# Altium PCB FLIP_FLOP.PcbDoc
Units mil, origin at the board's own origin, x right, y up, seen from the top; angles counter-clockwise.
Board outline 1790 x 1220 mil, 2 copper layers (Top Layer, Bottom Layer); 13 components, 10 nets, 31 pads, 0 vias.
Unrouted connection lines stored in the file: 1.
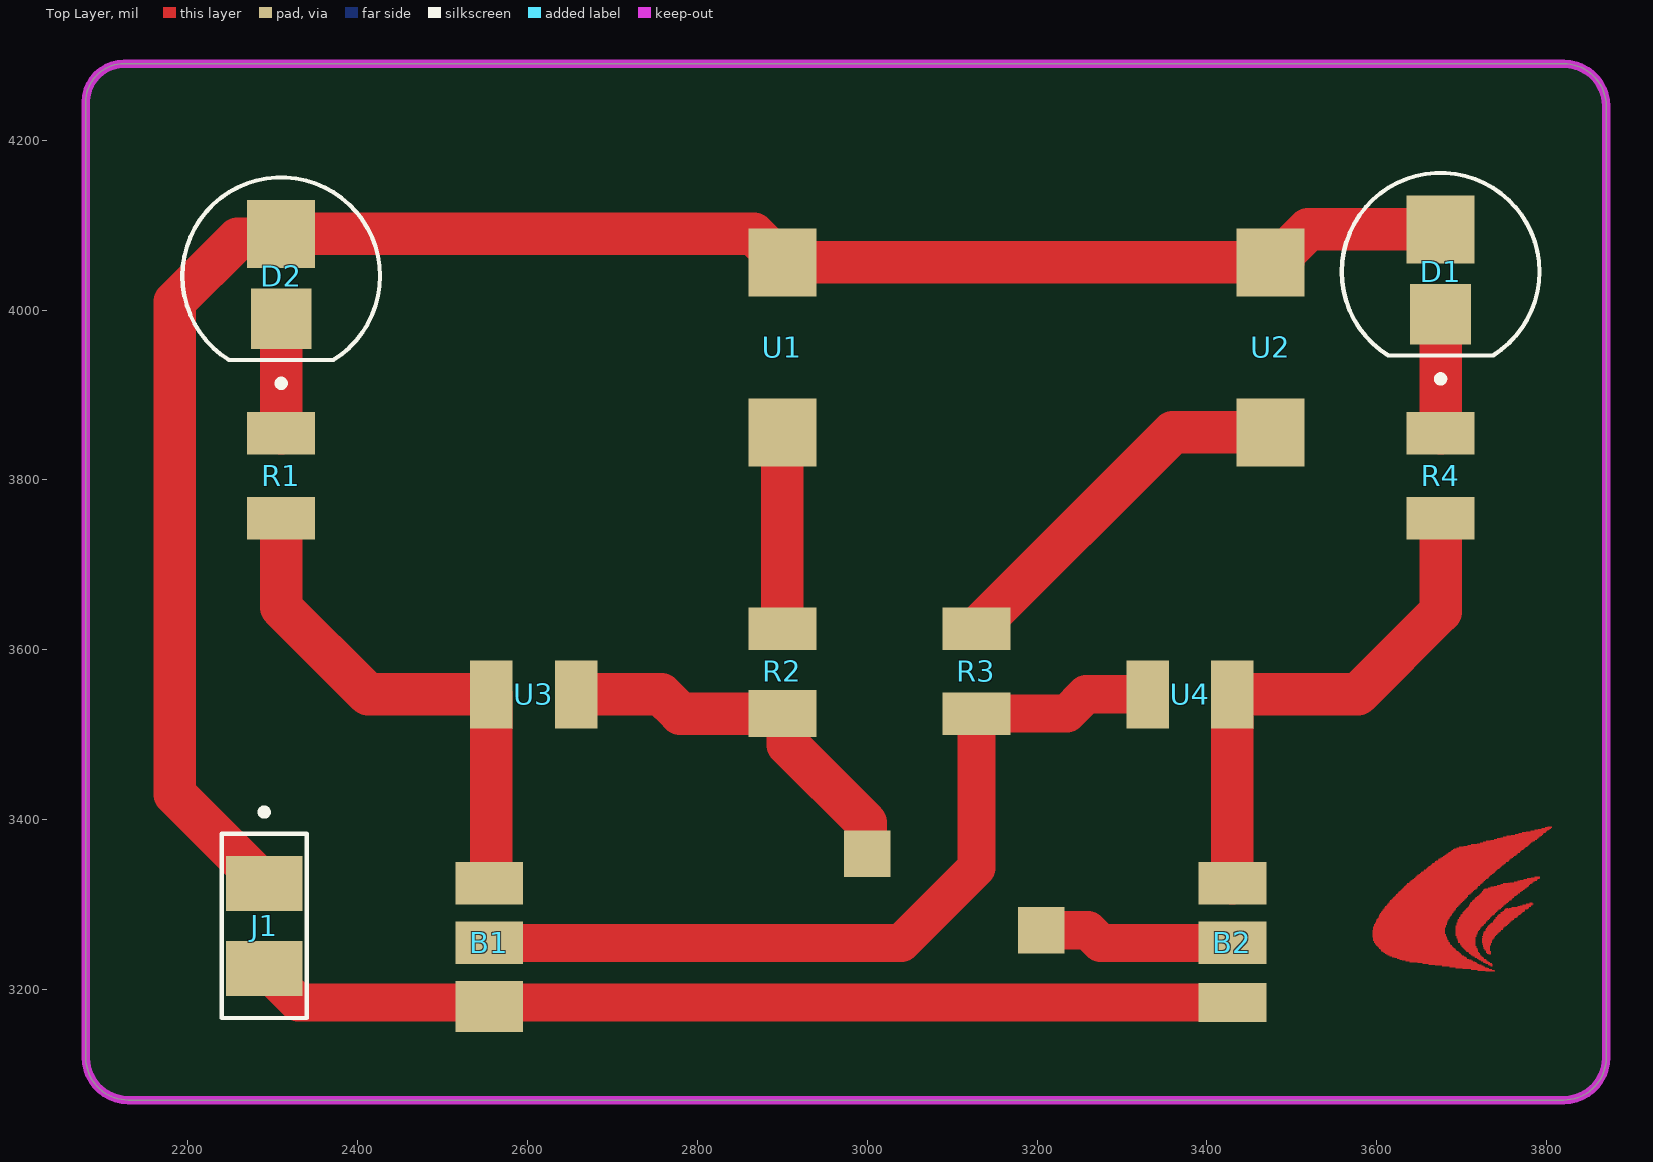
[diagram p0: Top Layer view]
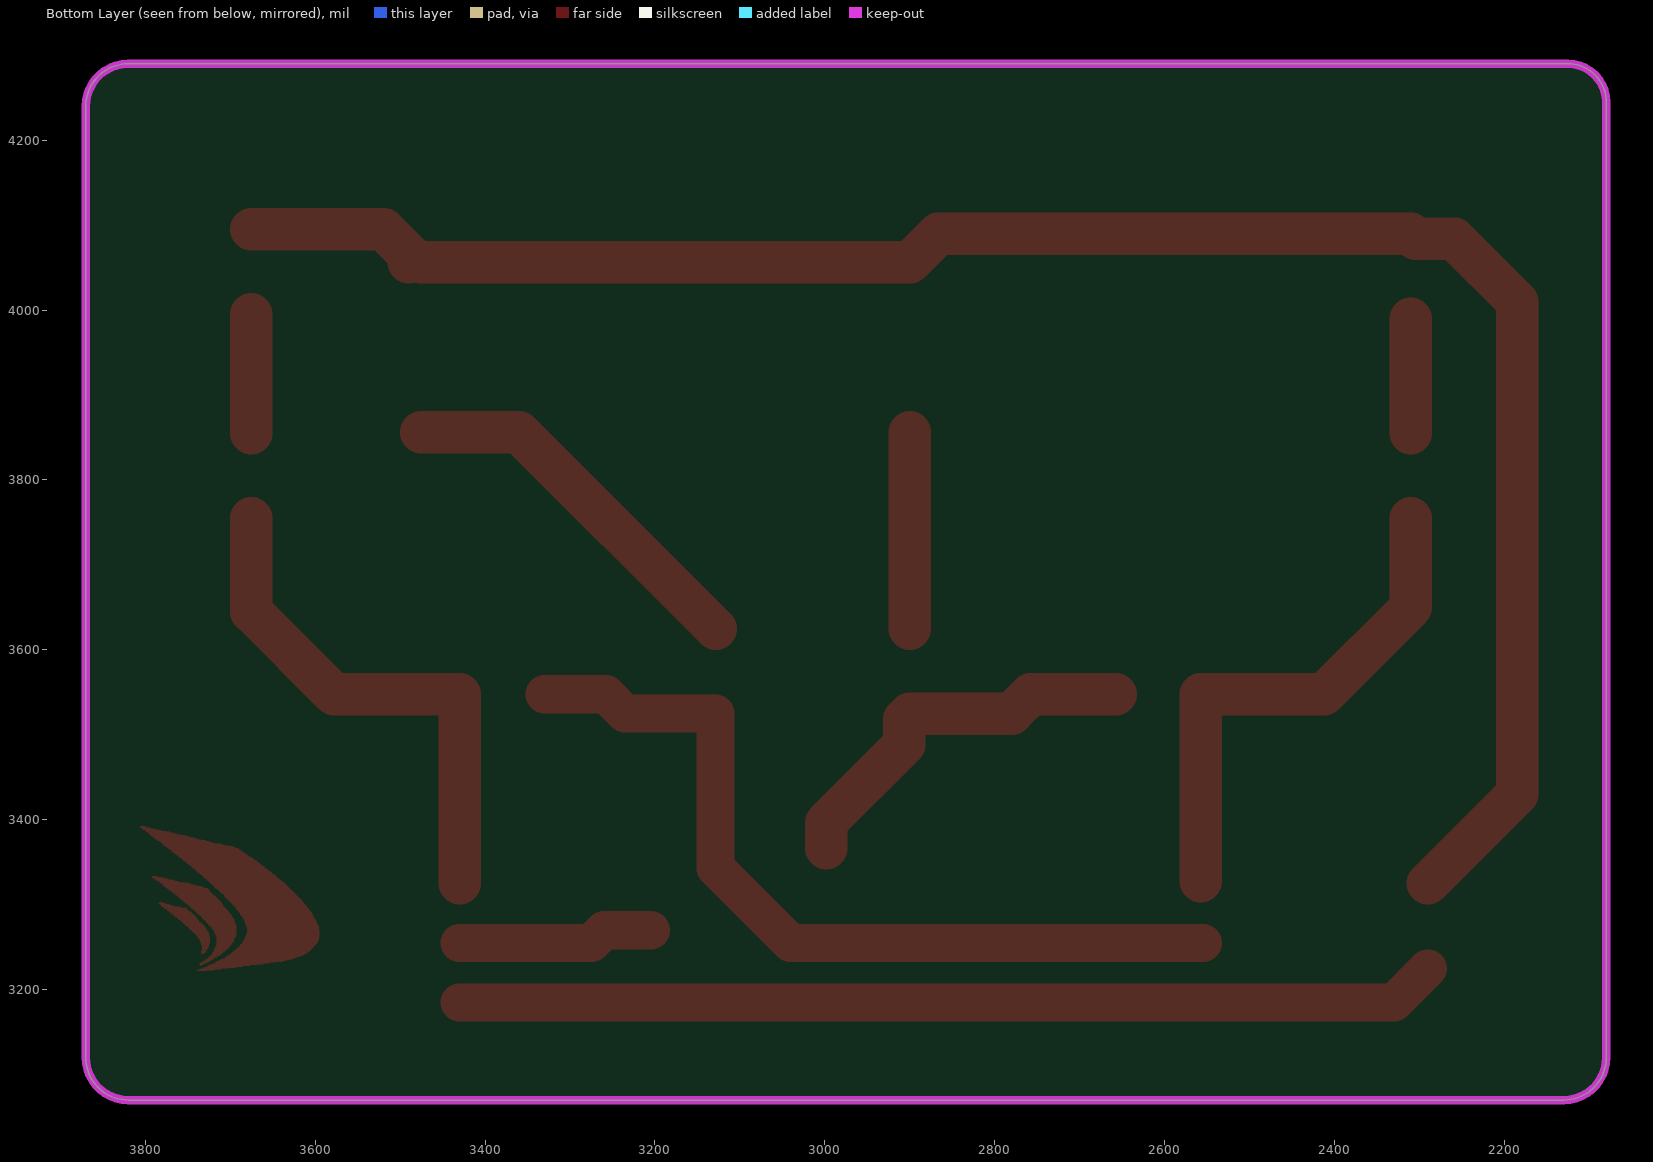
[diagram p1: Bottom Layer view, seen from below]
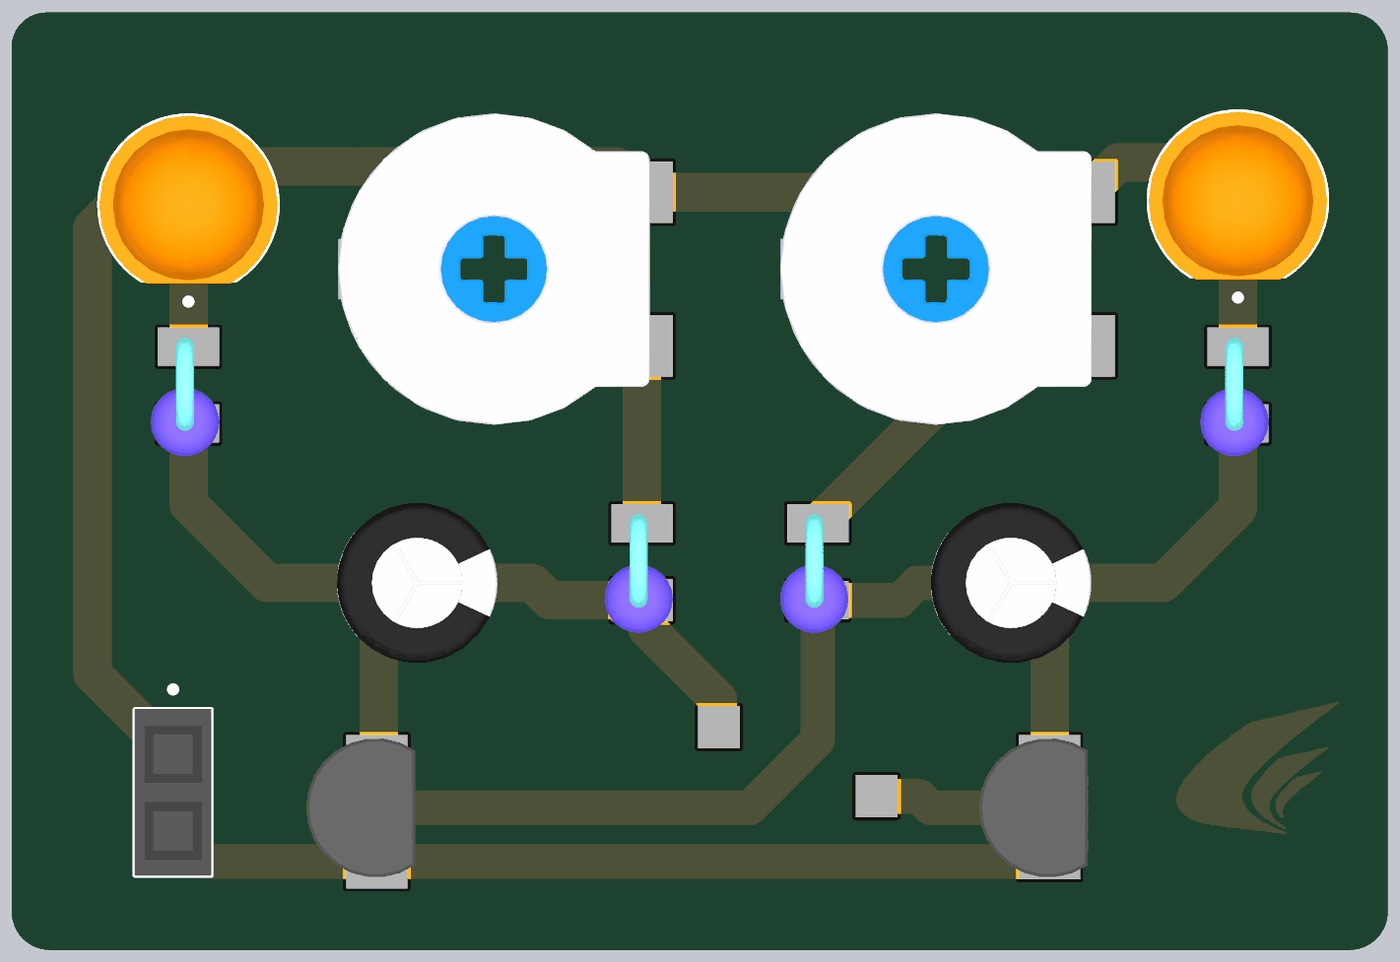
[diagram p2: 3D render of the assembled board from above, using the file's embedded part models]

## Layer stack, top to bottom
Top Solder: solder mask 0.4, Solder Resist, Dk 3.5
Top Layer: signal copper 1.4
Dielectric 1: dielectric 12.6, FR-4, Dk 4.8
Bottom Layer: signal copper 1.4
Bottom Solder: solder mask 0.4, Solder Resist, Dk 3.5

## Board outline
2080,3120 2080,4245 cw(c2125,4245) 2125,4290 3820,4290 cw(c3820,4240) 3870,4240 3870,3120 cw(c3820,3120) 3820,3070 2130,3070 cw(c2130,3120)

## Design rules (kind name [scope] priority, off if disabled: settings)
Clearance [All] p1: gap=10 ignorepadtopadclearanceinfootprint=FALSE
PolygonConnect [All] p1: connectstyle=Relief reliefconductorwidth=10 reliefentries=4 polygonreliefangle="90 Angle" airgapwidth=10
RoutingVias [All] p1: holewidth=28 width=50 viastyle="Through Hole" minholewidth=28 minwidth=50 maxholewidth=28 maxwidth=50
SolderMaskExpansion [All] p1: expansion=4 istentingtop=FALSE
Width [All] p1: maxlimit=10 minlimit=10 preferedwidth=10
30 further rules are at their usual default settings.

## Components (designator, comment, footprint, x,y, rotation, side; value= is the part's Value field where it differs from the comment)
B1 "NEW_BC547" NEW_BC547#1 2555,3325 r270 top
B2 "NEW_BC547" NEW_BC547#2 3430,3325 r270 top
D1 "L08R5000Q1" LEDRD254W57D500H1070 3675,4045 r90 top
D2 "L08R5000Q1" LEDRD254W57D500H1070 2310,4039.77 r90 top
J1 "68685-302LF" AMPHENOL_68685-302LF 2290,3275 r90 top
R1 "VERTICAL RESISTOR" VERTICAL_RESISTOR#1 2310,3755 r90 top
R2 "VERTICAL RESISTOR" VERTICAL_RESISTOR#2 2900,3525 r90 top
R3 "VERTICAL RESISTOR" VERTICAL_RESISTOR#1 3128.58,3525 r90 top
R4 "VERTICAL RESISTOR" VERTICAL_RESISTOR#1 3675,3755 r90 top
U1 "220K TRIMPOT" 220K_TRIMPOT 2900,3856.1 r90 top
U2 "220K TRIMPOT" 220K_TRIMPOT 3475,3856.1 r90 top
U3 "10uF CAPACITOR" 10uF_CAPACITOR 2557.55,3547.67 r0 top
U4 "10uF CAPACITOR" 10uF_CAPACITOR 3330,3547.67 r0 top

## Footprints (in the part's own frame and the unit in brackets; to place one, negate y for a bottom-side part, rotate by r counter-clockwise, add the part's x,y. Pads: shape width x height; smd on the part's side, far side on the other; paste and mask are expansions set on the pad)
10uF_CAPACITOR [mil] "U?"
  rect 50x80 smd: 0(0,0) 1(100,0)
  body extent -54,-104 154,104, height 472
220K_TRIMPOT [mil]
  rect 80x80 smd: 0(0,0) 1(200,0)
  body extent -103,-10 303,396, height 231
AMPHENOL_68685-302LF [mil]
  rect 65x90 smd: 01(50,0) 02(-50,0)
  silkscreen extent -108,-50 138,50, body extent -108,-50 108,50, height 276
LEDRD254W57D500H1070 [mil]
  rect 80x80 smd: A(50,0)
  rect 71.46x71.46 smd: C(-50,0)
  silkscreen extent -130,-116 116,116, body extent -102,-116 116,116, height 358
NEW_BC547#1 [mil]
  rect 50x80 smd: 0(0,0) 1(70,0) 2(140,0)
  body extent -21,-92 161,50, height 200
NEW_BC547#2 [mil]
  rect 50x80 smd: 0(0,0) 1(70,0)
  rect 46x80 smd: 2(140,0)
  body extent -21,-92 161,50, height 200
VERTICAL_RESISTOR#1 [mil]
  rect 50x80 smd: 0(0,0) 1(100,0)
  body extent -42,-40 112,49, height 366
VERTICAL_RESISTOR#2 [mil]
  rect 55x80 smd: 0(0,0)
  rect 50x80 smd: 1(100,0)
  body extent -42,-40 112,49, height 366

## Part data
B1 B2: "BC547"
D1 D2: "LED, 5MM, ORANGE; LED / Lamp Size: 5mm / T-1 3/4; LED Colour: Orange; Typ Luminous Intensity: 4.3mcd; Viewing Angle: ...", Package=None, Availability="In Stock", Check_prices=https://www.snapeda.com/parts/L08R5000Q1/LED+Technology/view-part/?ref=eda, MF="LED Technology", MP=L08R5000Q1, Price=None, SnapEDA_Link=https://www.snapeda.com/parts/L08R5000Q1/LED+Technology/view-part/?ref=snap
J1: "DuboxÂ®, Board to Board connector, PCB Mounted Receptacle, Vertical, Through Hole, Top Entry, Single Row, 2 positions, 2.54mm (0.100in) Pitch.", Package=None, Check_prices=https://www.snapeda.com/parts/68685-302LF/Amphenol+FCI/view-part/?ref=eda, Digi-Key_Part_Number=609-68685-302LF-ND, MF="Amphenol ICC (FCI)", MP=68685-302LF, Purchase-URL=https://pricing.snapeda.com/search/part/68685-302LF/?ref=eda, SnapEDA_Link=https://www.snapeda.com/parts/68685-302LF/Amphenol+FCI/view-part/?ref=snap
U1 U2: "vertical trimpot"

## Free pads (board coordinates)
  rect 55x55 smd: 3(3000,3360) 4(3205,3270)
  rect 80x50 smd: 5(2555,3175)

## Nets (pads, with @x,y where several pads share a name; then routed paths per layer and width w, separated by ;. In a path a pad name is that pad's centre, name@x,y a point inside that pad or via, vN(x,y) a via of type N, cw(c..) or ccw(c..) an arc to the next point about the centre after c; other vN are vias at no path point)
NetB1_0: B1.0 R1.0 U3.0 | length 615.1
  Top Layer w50: R1.0 2310,3650 2412.33,3547.67 U3.0 B1.0@2557.55,3327.55
NetB1_1: B1.1 R3.0 U4.0 | length 1002.5
  Top Layer w45: B1.1 3040,3255 3128.58,3343.58 R3.0 3235,3525 3257.67,3547.67 U4.0
NetB1_2: B1.2 B2.2 J1.02 pad.5 | length 1156.6
  Top Layer w45: J1.02 2330,3185 B1.2 B2.2
NetB2_0: B2.0 R4.0 U4.1 | length 618
  Top Layer w50: B2.0 U4.1 3577.67,3547.67 3675,3645 R4.0
NetB2_1: B2.1 pad.3 pad.4 R2.0 U3.1 | length 689
  Top Layer w10: R2.0 R2.0@2906.64,3518.36 ; pad.3@2998.36,3366.64 pad.3
  Top Layer w45: pad.4 3260,3270 3275,3255 B2.1
  Top Layer w50: U3.1 2757.33,3547.67 2780,3525 R2.0 ; R2.0@2906.64,3518.36 2906.64,3488.36 2998.36,3396.64 pad.3@2998.36,3366.64
NetD1_A: D1.A D2.A J1.01 U1.1 U2.1 | length 2272.2
  Top Layer w50: J1.01 2185,3430 2185,4010 2259.03,4084.03 2304.26,4084.03 D2.A 2866.33,4089.77 U1.1 U2.1 ; U2.1@3490,4056.1 3490,4065.71 3519.29,4095 D1.A
NetD1_C: D1.C R4.1 | length 140
  Top Layer w50: R4.1 D1.C
NetD2_C: D2.C R1.1 | length 134.8
  Top Layer w50: R1.1 D2.C
NetR2_1: R2.1 U1.0 | length 231.1
  Top Layer w50: R2.1 U1.0
NetR3_1: R3.1 U2.0 | length 442.1
  Top Layer w50: R3.1 3359.68,3856.1 U2.0
copper on no net: | length 16870
  Top Layer w1: 3595,3262 3682,3262 ; 3595,3263 3681,3263 ; 3595,3264 3681,3264 ; 3595,3265 3681,3265 ; 3595,3266 3680,3266 ; 3595,3267 3680,3267 ; 3595,3268 3680,3268 ; 3595,3269 3680,3269 ; 3595,3270 3680,3270 ; 3596,3258 3684,3258 ; 3596,3259 3683,3259 ; 3596,3260 3683,3260 ; 3596,3261 3682,3261 ; 3596,3271 3680,3271 ; 3596,3272 3680,3272 ; 3596,3273 3680,3273 ; 3596,3274 3681,3274 ; 3597,3256 3685,3256 ; 3597,3257 3684,3257 ; 3597,3275 3681,3275 ; 3597,3276 3681,3276 ; 3597,3277 3682,3277 ; 3598,3254 3686,3254 ; 3598,3255 3686,3255 ; 3598,3278 3682,3278 ; 3598,3279 3682,3279 ; 3599,3253 3687,3253 ; 3599,3280 3683,3280 ; 3599,3281 3683,3281 ; 3600,3252 3688,3252 ; 3600,3282 3684,3282 ; 3600,3283 3684,3283 ; 3601,3251 3689,3251 ; 3601,3284 3685,3284 ; 3602,3250 3690,3250 ; 3602,3285 3685,3285 ; 3602,3286 3686,3286 ; 3603,3249 3691,3249 ; 3603,3287 3687,3287 ; 3603,3288 3688,3288 ; 3604,3248 3692,3248 ; 3604,3289 3688,3289 ; 3604,3290 3689,3290 ; 3605,3246 3694,3246 ; 3605,3247 3693,3247 ; 3605,3291 3690,3291 ; 3606,3292 3690,3292 ; 3607,3245 3696,3245 ; 3607,3293 3691,3293 ; 3607,3294 3692,3294 ; 3608,3244 3697,3244 ; 3608,3295 3693,3295 ; 3609,3296 3693,3296 ; 3609,3297 3694,3297 ; 3610,3243 3698,3243 ; 3610,3298 3695,3298 ; 3611,3242 3699,3242 ; 3611,3299 3696,3299 ; 3612,3300 3697,3300 ; 3613,3241 3700,3241 ; 3613,3301 3698,3301 ; 3614,3302 3699,3302 ; 3615,3240 3702,3240 ; 3615,3303 3700,3303 ; 3615,3304 3701,3304 ; 3616,3305 3702,3305 ; 3617,3306 3703,3306 ; 3618,3239 3704,3239 ; 3618,3307 3704,3307 ; 3619,3308 3705,3308 ; 3620,3309 3706,3309 ; 3621,3238 3705,3238 ; 3621,3310 3707,3310 ; 3622,3311 3707,3311 ; 3623,3312 3708,3312 ; 3624,3237 3706,3237 ; 3624,3313 3710,3313 ; 3625,3314 3711,3314 ; 3626,3315 3712,3315 ; 3627,3236 3708,3236 ; 3627,3316 3713,3316 ; 3628,3317 3714,3317 ; 3629,3318 3715,3318 ; 3630,3235 3711,3235 ; 3630,3319 3717,3319 ; 3631,3320 3718,3320 ; 3632,3321 3718,3321 ; 3633,3322 3719,3322 ; 3634,3234 3713,3234 ; 3634,3323 3721,3323 ; 3635,3324 3722,3324 ; 3636,3325 3723,3325 ; 3638,3326 3724,3326 ; 3639,3233 3715,3233 ; 3639,3327 3725,3327 ; 3640,3328 3726,3328 ; 3641,3329 3727,3329 ; 3642,3330 3728,3330 ; 3644,3331 3730,3331 ; 3645,3332 3731,3332 ; 3646,3333 3732,3333 ; 3647,3334 3733,3334 ; 3648,3232 3717,3232 ; 3648,3335 3734,3335 ; 3650,3336 3735,3336 ; 3651,3337 3737,3337 ; 3652,3338 3738,3338 ; 3653,3339 3739,3339 ; 3654,3231 3718,3231 ; 3655,3340 3740,3340 ; 3656,3341 3741,3341 ; 3658,3342 3742,3342 ; 3659,3343 3744,3343 ; 3660,3344 3745,3344 ; 3661,3230 3720,3230 ; 3661,3345 3746,3345 ; 3663,3346 3747,3346 ; 3664,3347 3749,3347 ; 3665,3348 3750,3348 ; 3666,3349 3751,3349 ; 3668,3350 3752,3350 ; 3669,3229 3723,3229 ; 3669,3351 3754,3351 ; 3670,3352 3755,3352 ; 3672,3353 3756,3353 ; 3673,3354 3757,3354 ; 3675,3355 3759,3355 ; 3677,3228 3725,3228 ; 3677,3356 3760,3356 ; 3678,3357 3761,3357 ; 3680,3358 3763,3358 ; 3681,3359 3764,3359 ; 3682,3360 3765,3360 ; 3684,3361 3766,3361 ; 3685,3362 3768,3362 ; 3686,3227 3727,3227 ; 3687,3363 3769,3363 ; 3688,3364 3770,3364 ; 3690,3365 3772,3365 ; 3691,3366 3773,3366 ; 3693,3226 3730,3226 ; 3693,3264 3717,3264 ; 3693,3265 3717,3265 ; 3693,3266 3718,3266 ; 3693,3267 3718,3267 ; 3693,3268 3719,3268 ; 3693,3269 3719,3269 ; 3693,3270 3720,3270 ; 3693,3271 3721,3271 ; 3693,3272 3722,3272 ; 3693,3273 3722,3273 ; 3693,3274 3723,3274 ; 3693,3275 3724,3275 ; 3694,3261 3716,3261 ; 3694,3262 3716,3262 ; 3694,3263 3717,3263 ; 3694,3276 3725,3276 ; 3694,3277 3726,3277 ; 3694,3278 3727,3278 ; 3694,3279 3728,3279 ; 3694,3367 3774,3367 ; 3695,3259 3716,3259 ; 3695,3260 3716,3260 ; 3695,3280 3728,3280 ; 3695,3281 3730,3281 ; 3695,3282 3730,3282 ; 3696,3256 3716,3256 ; 3696,3257 3716,3257 ; 3696,3258 3716,3258 ; 3696,3283 3732,3283 ; 3697,3284 3733,3284 ; 3697,3285 3733,3285 ; 3697,3368 3775,3368 ; 3698,3254 3716,3254 ; 3698,3255 3716,3255 ; 3698,3286 3734,3286 ; 3699,3253 3716,3253 ; 3699,3287 3735,3287 ; 3699,3288 3737,3288 ; 3700,3251 3717,3251 ; 3700,3252 3716,3252 ; 3700,3289 3738,3289 ; 3701,3225 3732,3225 ; 3701,3250 3717,3250 ; 3701,3290 3739,3290 ; 3701,3291 3740,3291 ; 3702,3249 3718,3249 ; 3702,3292 3741,3292 ; 3702,3369 3777,3369 ; 3703,3248 3718,3248 ; 3703,3293 3742,3293 ; 3704,3247 3719,3247 ; 3704,3294 3743,3294 ; 3705,3246 3719,3246 ; 3705,3295 3745,3295 ; 3706,3245 3719,3245 ; 3706,3296 3746,3296 ; 3707,3297 3747,3297 ; 3707,3370 3778,3370 ; 3708,3244 3720,3244 ; 3708,3298 3748,3298 ; 3709,3243 3721,3243 ; 3709,3299 3749,3299 ; 3709,3300 3750,3300 ; 3710,3242 3721,3242 ; 3710,3301 3752,3301 ; 3710,3302 3753,3302 ; 3711,3224 3735,3224 ; 3711,3241 3722,3241 ; 3711,3303 3754,3303 ; 3711,3371 3779,3371 ; 3712,3304 3755,3304 ; 3713,3240 3723,3240 ; 3713,3305 3756,3305 ; 3714,3306 3758,3306 ; 3715,3239 3724,3239 ; 3715,3307 3759,3307 ; 3716,3238 3725,3238 ; 3716,3308 3760,3308 ; 3717,3309 3761,3309 ; 3718,3237 3726,3237 ; 3718,3310 3762,3310 ; 3718,3372 3780,3372 ; 3719,3223 3738,3223 ; 3720,3236 3728,3236 ; 3720,3311 3764,3311 ; 3721,3235 3729,3235 ; 3721,3312 3765,3312 ; 3722,3313 3766,3313 ; 3722,3373 3781,3373 ; 3723,3234 3730,3234 ; 3723,3314 3768,3314 ; 3724,3254 3734,3254 ; 3724,3256 3735,3256 ; 3724,3257 3735,3257 ; 3724,3258 3735,3258 ; 3724,3259 3736,3259 ; 3724,3260 3737,3260 ; 3724,3261 3738,3261 ; 3724,3263 3739,3263 ; 3724,3315 3768,3315 ; 3724,3316 3770,3316 ; 3725,3233 3732,3233 ; 3725,3251 3733,3251 ; 3725,3252 3733,3252 ; 3725,3253 3734,3253 ; 3725,3255 3734,3255 ; 3725,3262 3738,3262 ; 3725,3264 3740,3264 ; 3725,3265 3741,3265 ; 3725,3266 3742,3266 ; 3725,3317 3772,3317 ; 3725,3374 3783,3374 ; 3726,3232 3733,3232 ; 3726,3249 3733,3249 ; 3726,3250 3733,3250 ; 3726,3267 3743,3267 ; 3726,3268 3744,3268 ; 3726,3318 3773,3318 ; 3727,3247 3733,3247 ; 3727,3248 3733,3248 ; 3727,3269 3745,3269 ; 3727,3319 3774,3319 ; 3728,3222 3739,3222 ; 3728,3231 3735,3231 ; 3728,3270 3746,3270 ; 3728,3271 3748,3271 ; 3729,3244 3734,3244 ; 3729,3245 3734,3245 ; 3729,3246 3733,3246 ; 3729,3272 3748,3272 ; 3729,3375 3785,3375 ; 3730,3243 3734,3243 ; 3730,3273 3749,3273 ; 3730,3274 3750,3274 ; 3731,3230 3736,3230 ; 3731,3275 3752,3275 ; 3731,3320 3776,3320 ; 3732,3229 3736,3229 ; 3732,3242 3734,3242 ; 3732,3276 3753,3276 ; 3733,3277 3754,3277 ; 3734,3228 3736,3228 ; 3734,3278 3755,3278 ; 3734,3321 3777,3321 ; 3734,3376 3786,3376 ; 3735,3279 3756,3279 ; 3737,3280 3757,3280 ; 3737,3281 3758,3281 ; 3738,3282 3760,3282 ; 3738,3322 3778,3322 ; 3738,3377 3788,3377 ; 3739,3283 3761,3283 ; 3740,3284 3762,3284 ; 3740,3285 3764,3285 ; 3742,3286 3765,3286 ; 3742,3287 3766,3287 ; 3742,3323 3779,3323 ; 3742,3378 3789,3378 ; 3743,3288 3767,3288 ; 3744,3289 3769,3289 ; 3746,3290 3770,3290 ; 3746,3291 3771,3291 ; 3746,3324 3780,3324 ; 3746,3379 3790,3379 ; 3748,3292 3773,3292 ; 3749,3325 3782,3325 ; 3749,3380 3791,3380 ; 3750,3293 3774,3293 ; 3750,3294 3774,3294 ; 3751,3295 3777,3295 ; 3753,3296 3754,3296 ; 3753,3381 3793,3381 ; 3755,3326 3756,3326 ; 3756,3296 3778,3296 ; 3757,3326 3783,3326 ; 3758,3382 3794,3382 ; 3759,3297 3779,3297 ; 3762,3327 3784,3327 ; 3763,3383 3795,3383 ; 3766,3298 3781,3298 ; 3766,3328 3786,3328 ; 3767,3384 3796,3384 ; 3769,3299 3781,3299 ; 3769,3329 3788,3329 ; 3771,3385 3798,3385 ; 3772,3300 3783,3300 ; 3773,3330 3789,3330 ; 3776,3301 3784,3301 ; 3776,3386 3799,3386 ; 3777,3331 3791,3331 ; 3780,3302 3783,3302 ; 3781,3387 3800,3387 ; 3782,3332 3792,3332 ; 3786,3333 3792,3333 ; 3786,3388 3802,3388 ; 3790,3389 3803,3389 ; 3794,3390 3805,3390 ; 3798,3391 3806,3391 ; 3801,3392 3806,3392

## Keep-outs
Keep-Out Layer:
  the board outline again, w10